# Altium PCB PCB1.PcbDoc
Units mm, origin at the board's own origin, x right, y up, seen from the top; angles counter-clockwise.
Board outline 200 x 200 mm, 2 copper layers (Top Layer, Bottom Layer); 124 components, 110 nets, 534 pads, 0 vias.
Unrouted connection lines stored in the file: 316.
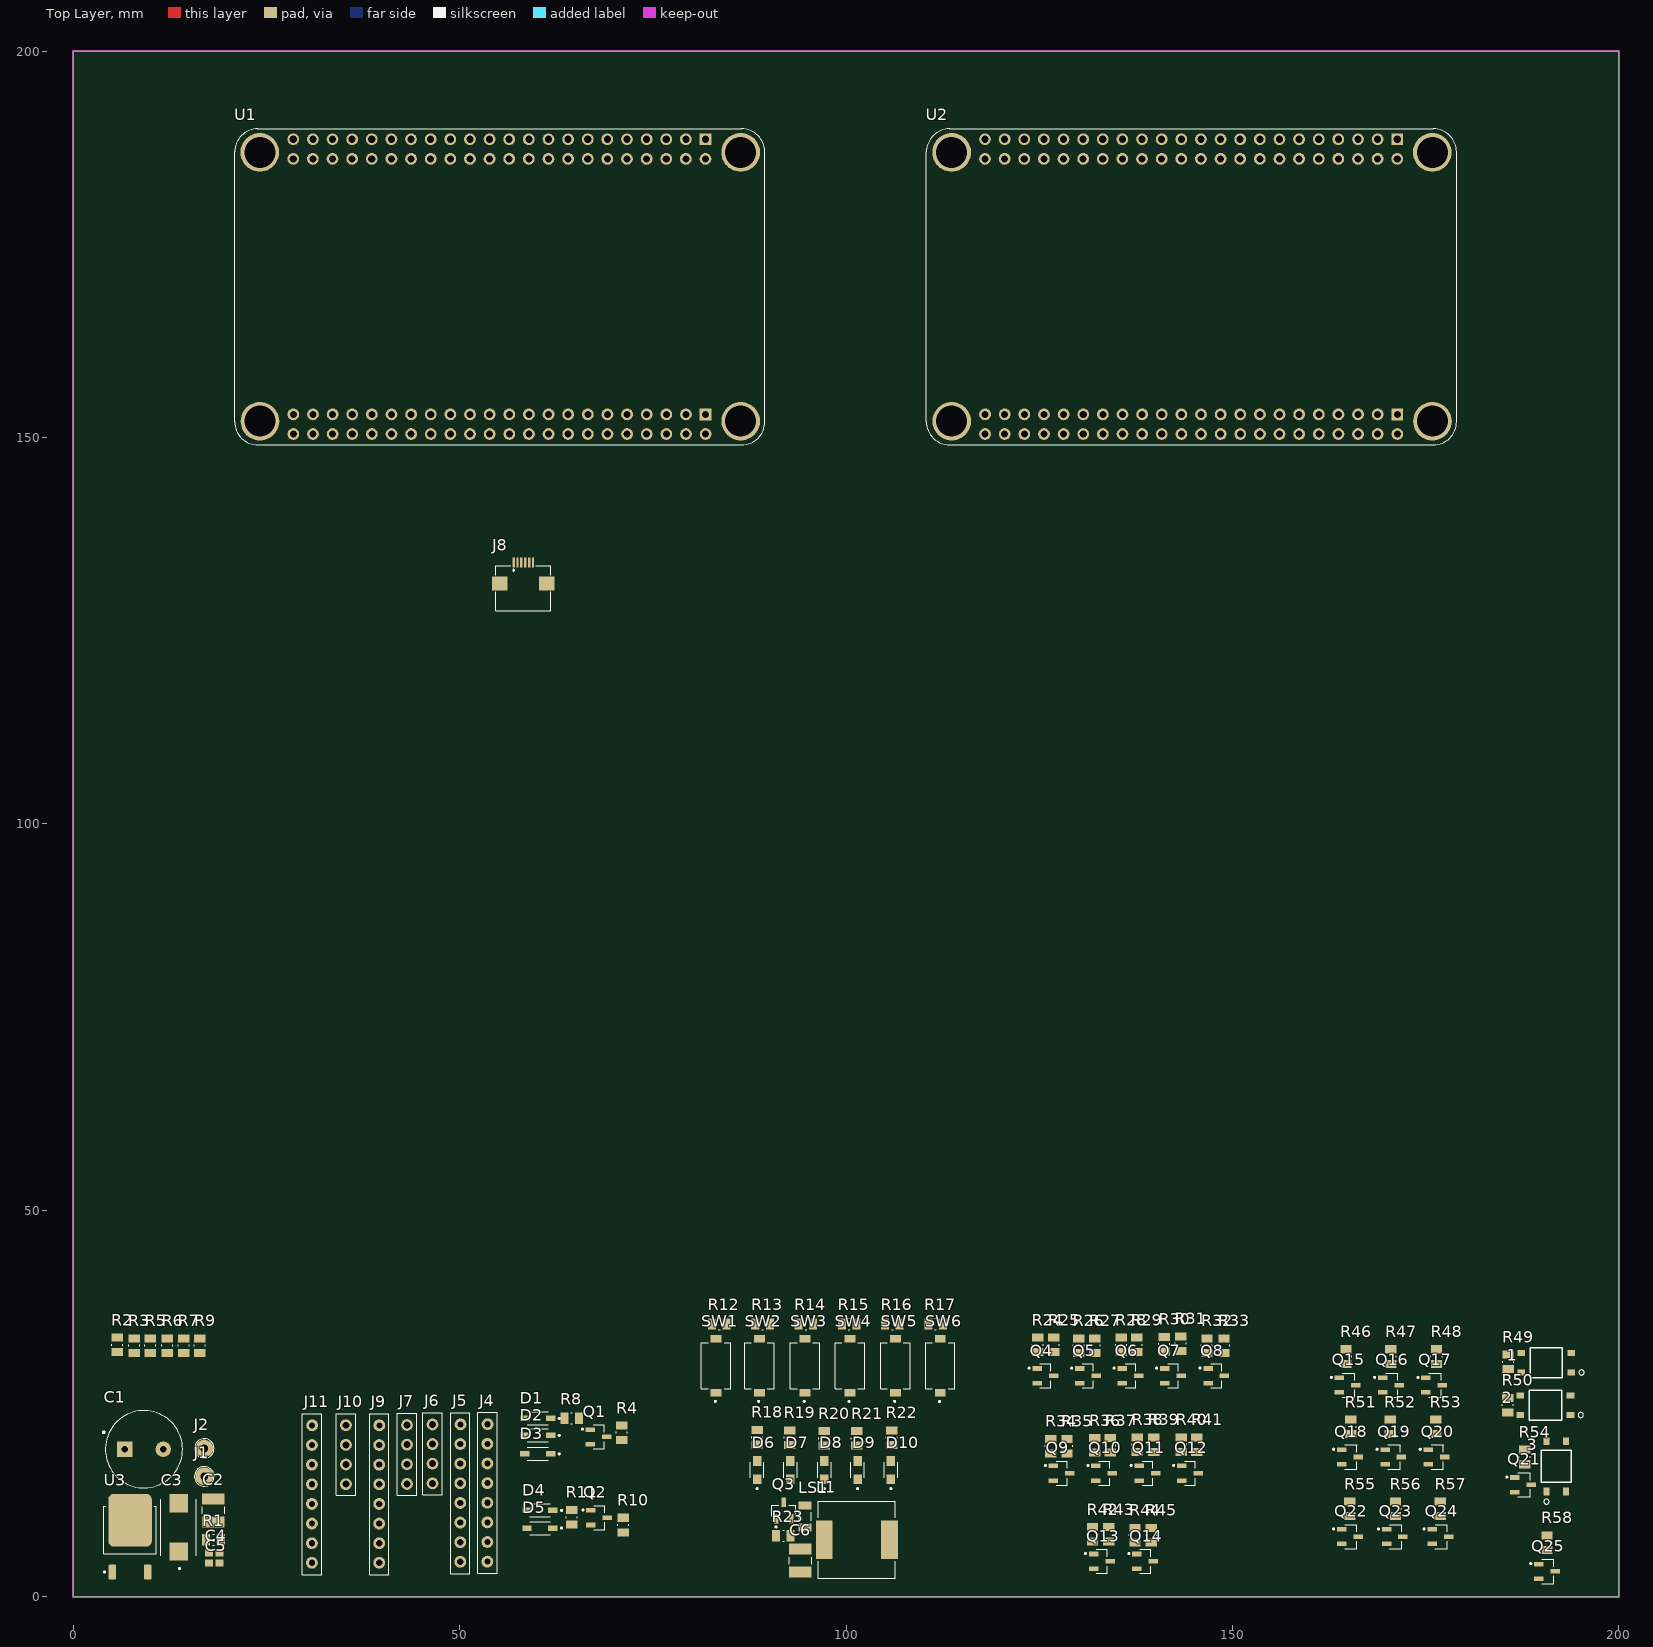
[diagram p0: Top Layer view]
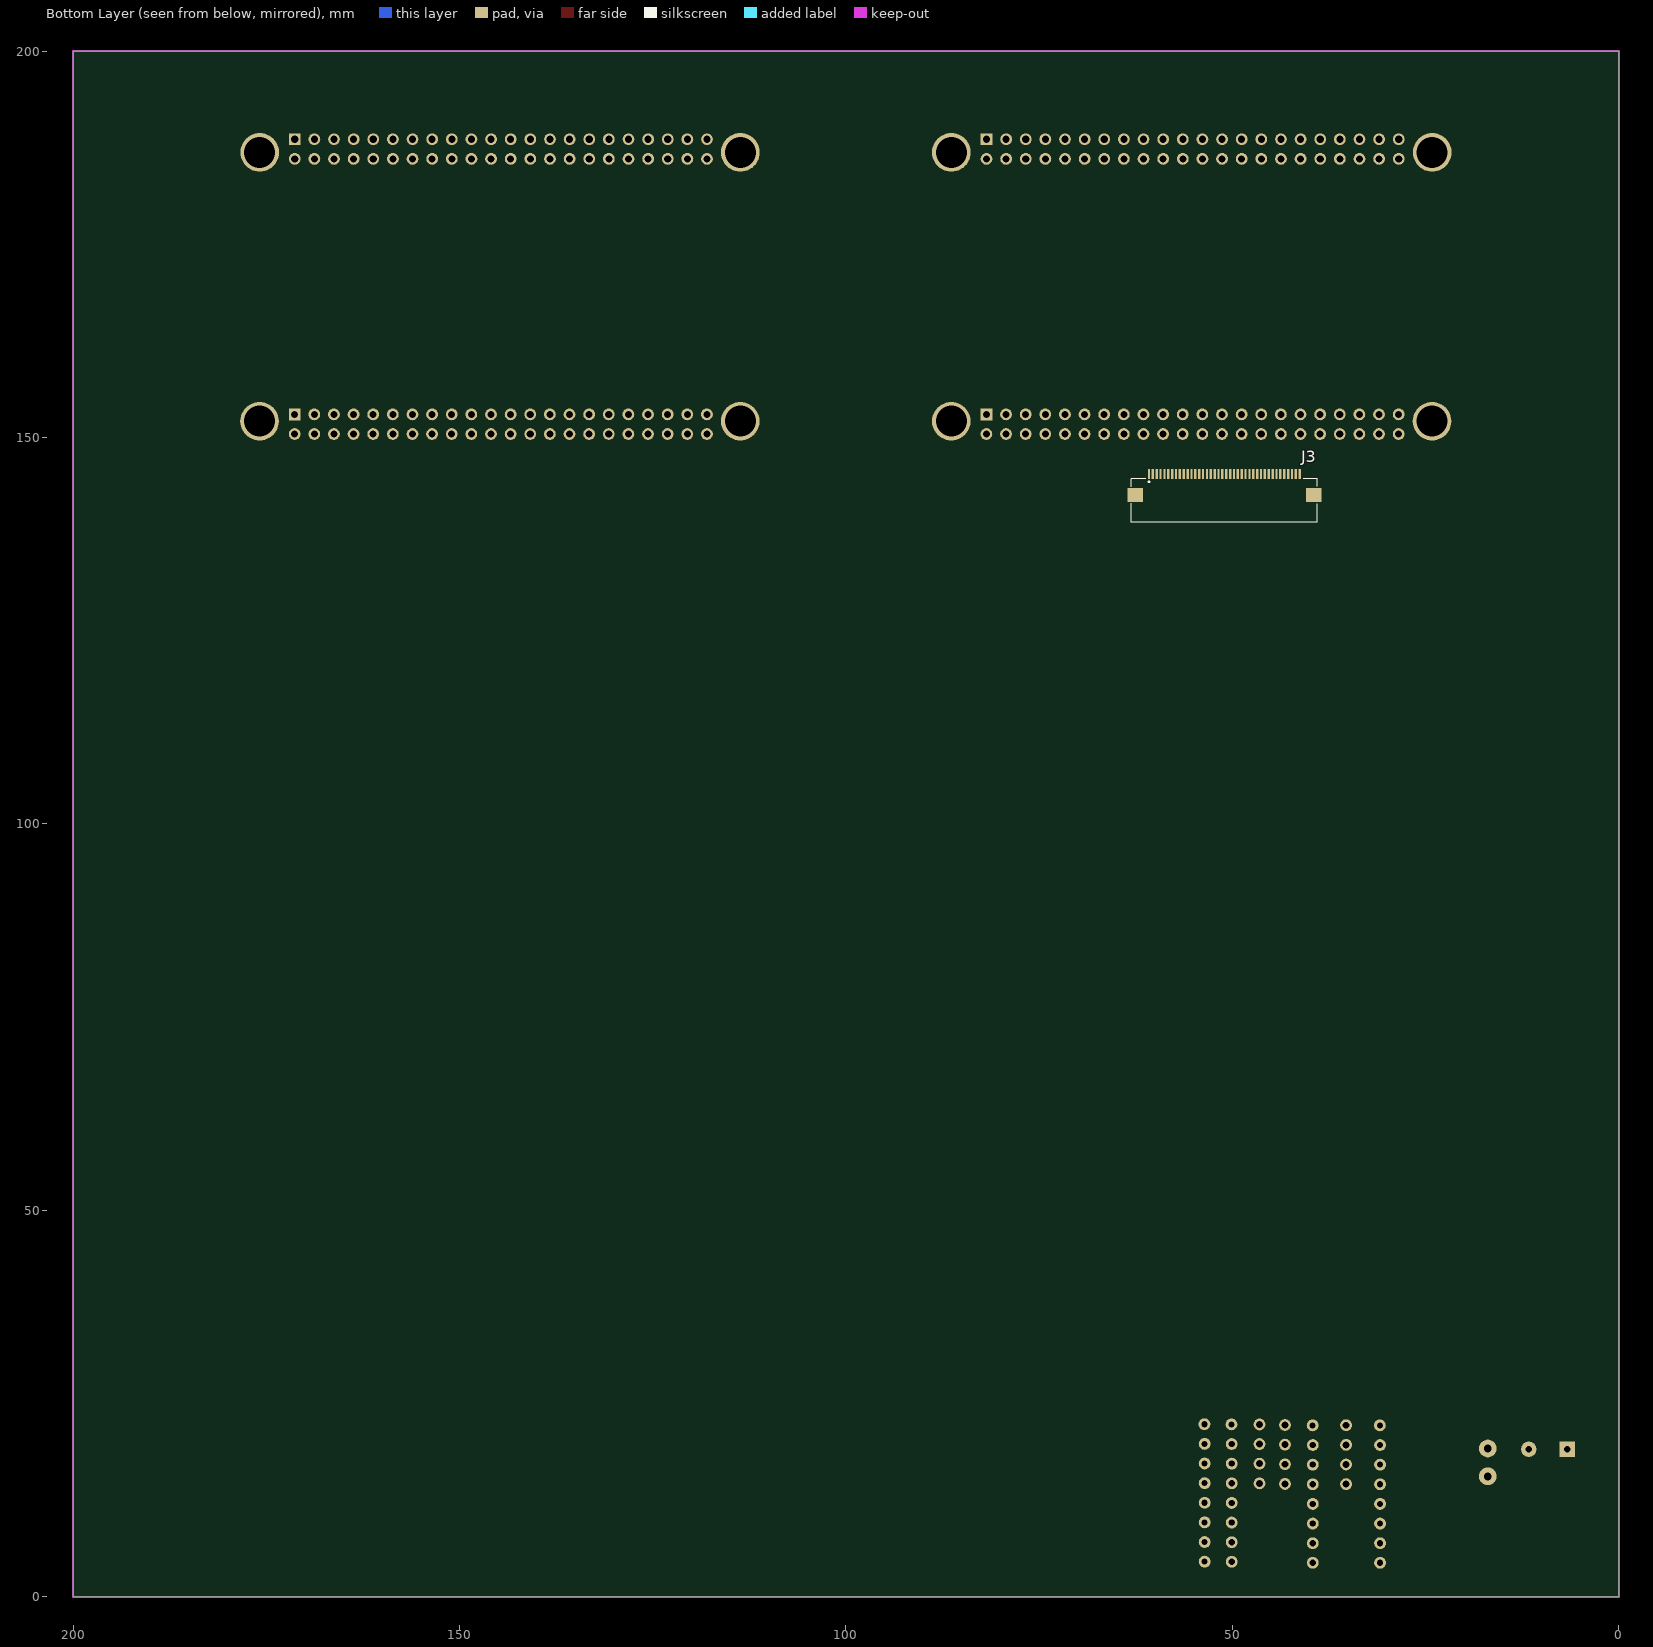
[diagram p1: Bottom Layer view, seen from below]

## Layer stack, top to bottom
Top Solder: solder mask 0.0102, Solder Resist, Dk 3.5
Top Layer: signal copper 0.0356
Dielectric 1: dielectric 0.32, FR-4, Dk 4.8
Bottom Layer: signal copper 0.0356
Bottom Solder: solder mask 0.0102, Solder Resist, Dk 3.5

## Board outline
0,0 200,0 200,200 0,200

## Design rules (kind name [scope] priority, off if disabled: settings)
Clearance [All] p1: gap=0.254 ignorepadtopadclearanceinfootprint=FALSE except(0: Arc-Hole Track-Hole SMDPad-Hole THPad-Hole Via-Hole Fill-Hole Poly-Hole Region-Hole Text-Hole; 0.1: Arc-SMDPad Track-SMDPad SMDPad-SMDPad)
PolygonConnect [All] p1: connectstyle=Relief reliefconductorwidth=0.254 reliefentries=4 polygonreliefangle="90 Angle" airgapwidth=0.254
RoutingVias [All] p1: holewidth=0.711 width=1.27 viastyle="Through Hole" minholewidth=0.711 minwidth=1.27 maxholewidth=0.711 maxwidth=1.27
SolderMaskExpansion [All] p1: expansion=0.102 istentingtop=FALSE
Width [All] p1: maxlimit=0.254 minlimit=0.254 preferedwidth=0.254
30 further rules are at their usual default settings.

## Classes and differential pairs
component class Sheet5: 1 2 3 Q15 Q16 Q17 Q18 Q19 Q20 Q21 Q22 Q23 Q24 Q25 R46 R47 R48 R49 R50 R51 R52 R53 R54 R55 R56 R57 R58
component class Sheet4: Q4 Q5 Q6 Q7 Q8 Q9 Q10 Q11 Q12 Q13 Q14 R24 R25 R26 R27 R28 R29 R30 R31 R32 R33 R34 R35 R36 R37 R38 R39 R40 R41 R42 R43 R44 R45
component class Sheet3: C6 D6 D7 D8 D9 D10 L1 LS1 Q3 R12 R13 R14 R15 R16 R17 R18 R19 R20 R21 R22 R23 SW1 SW2 SW3 SW4 SW5 SW6
component class Sheet2: D1 D2 D3 D4 D5 J5 J10 J11 Q1 Q2 R2 R3 R4 R5 R6 R7 R8 R9 R10 R11
component class Sheet1: C1 C2 C3 C4 C5 J5 J10 R1 U1 U2 U3

## Components (designator, comment, footprint, x,y, rotation, side; value= is the part's Value field where it differs from the comment)
1 "LTV-356T" MINI-FLAT-4 190.6,30.299 r90 top
2 "LTV-356T" MINI-FLAT-4 190.5,24.799 r90 top
3 "LTV-356T" MINI-FLAT-4 191.899,16.9 r0 top
C1 "#NAME?" "CAP 10x16" 9.162,19.1 r0 top value=680μF
C2 "1uF" *CAPC3326X230N 18.162,11.192 r90 top value="10uF 35V"
C3 "#NAME?" "SMD 7343-43" 13.662,9 r90 top value=220uF
C4 "100nF" "SMD 0603" 18.262,5.7 r0 top value="10uF 35V"
C5 "1nF" "SMD 0603" 18.262,4.4 r0 top value="10uF 35V"
C6 "100uF" *CAPC3326X230N 94.1,4.692 r90 top
D1 "1N4148W-7-F" SOD123 60.1,23.1 r180 top
D2 "1N4148W-7-F" SOD123 60.1,20.9 r180 top
D3 "1N4148W-7-F" SOD123 60.1,18.5 r180 top
D4 "1N4148W-7-F" SOD123 60.4,11.2 r180 top
D5 "1N4148W-7-F" SOD123 60.4,8.9 r180 top
D6 "KP-2012" "SMD 0805 LED-Y" 88.499,16.4 r90 top
D7 "KP-2012" "SMD 0805 LED-Y" 92.799,16.4 r90 top
D8 "KP-2012" "SMD 0805 LED-Y" 97.199,16.4 r90 top
D9 "KP-2012" "SMD 0805 LED-Y" 101.499,16.4 r90 top
D10 "KP-2012" "SMD 0805 LED-Y" 105.799,16.4 r90 top
J1 "+12V" Wire 16.962,15.6 r0 top
J2 "GND" Wire 16.962,19.2 r0 top
J3 "FPC-40PinConnector" 687140149022 51.05,145.3 r180 bottom
J4 "PN1X8" PN1X8 53.6,13.45 r90 top
J5 "PN1X8" PN1X8 50.1,13.43 r90 top
J6 "PN1X4" PN1X4 46.499,18.5 r90 top
J7 "PN1X4" PN1X4 43.2,18.43 r90 top
J8 "FPC-6PinConnector" 687106149022 58.25,133.85 r0 top
J9 "PN1X8" PN1X8 39.6,13.3 r90 top
J10 "PN1X4" PN1X4 35.3,18.4 r90 top
J11 "PN1X8" PN1X8 30.9,13.3 r90 top
L1 "DRH104R" DRH104R 101.399,7.4 r0 top
LS1 "Buzzer" "SMD 1206 RES" 94.7,10.4 r90 top
Q1 "SST2222A" SOT-23-3 68,20.7 r0 top
Q2 "SST2222A" SOT-23-3 68.06,10.25 r0 top
Q3 "SST2222A" SOT-23-3 91.95,11.16 r90 top
Q4 "SST2222A" SOT-23-3 125.799,28.6 r0 top
Q5 "SST2222A" SOT-23-3 131.299,28.6 r0 top
Q6 "SST2222A" SOT-23-3 136.799,28.6 r0 top
Q7 "SST2222A" SOT-23-3 142.299,28.6 r0 top
Q8 "SST2222A" SOT-23-3 147.899,28.6 r0 top
Q9 "SST2222A" SOT-23-3 127.899,16 r0 top
Q10 "SST2222A" SOT-23-3 133.399,16 r0 top
Q11 "SST2222A" SOT-23-3 138.999,16 r0 top
Q12 "SST2222A" SOT-23-3 144.499,16 r0 top
Q13 "SST2222A" SOT-23-3 133.1,4.6 r0 top
Q14 "SST2222A" SOT-23-3 138.7,4.6 r0 top
Q15 "DTC114YKA" "SOT-346 (SC59) Black" 164.899,27.4 r0 top
Q16 "DTC114YKA" "SOT-346 (SC59) Black" 170.499,27.4 r0 top
Q17 "DTC114YKA" "SOT-346 (SC59) Black" 176.099,27.4 r0 top
Q18 "DTC114YKA" "SOT-346 (SC59) Black" 165.199,18.1 r0 top
Q19 "DTC114YKA" "SOT-346 (SC59) Black" 170.799,18.1 r0 top
Q20 "DTC114YKA" "SOT-346 (SC59) Black" 176.399,18.1 r0 top
Q21 "DTC114YKA" "SOT-346 (SC59) Black" 187.6,14.5 r0 top
Q22 "DTC114YKA" "SOT-346 (SC59) Black" 165.2,7.8 r0 top
Q23 "DTC114YKA" "SOT-346 (SC59) Black" 171,7.8 r0 top
Q24 "DTC114YKA" "SOT-346 (SC59) Black" 176.899,7.8 r0 top
Q25 "DTC114YKA" "SOT-346 (SC59) Black" 190.7,3.3 r0 top
R1 "47k" "SMD 0805" 18.162,7.4 r0 top
R2 "10k" "SMD 0805" 5.7,32.6 r90 top
R3 "10k" "SMD 0805" 7.9,32.5 r90 top
R4 "10k" "SMD 0805" 71,21.24 r90 top
R5 "10k" "SMD 0805" 10,32.5 r90 top
R6 "10k" "SMD 0805" 12.2,32.5 r90 top
R7 "10k" "SMD 0805" 14.3,32.499 r90 top
R8 "10k" "SMD 0805" 64.5,23.1 r0 top
R9 "10k" "SMD 0805" 16.4,32.5 r90 top
R10 "10k" "SMD 0805" 71.2,9.3 r90 top
R11 "10k" "SMD 0805" 64.5,10.3 r90 top
R12 "10k" "SMD 0805" 83.599,35.3 r0 top
R13 "10k" "SMD 0805" 89.199,35.3 r0 top
R14 "10k" "SMD 0805" 94.799,35.3 r0 top
R15 "10k" "SMD 0805" 100.399,35.3 r0 top
R16 "10k" "SMD 0805" 105.999,35.3 r0 top
R17 "10k" "SMD 0805" 111.599,35.3 r0 top
R18 "220Ohm" "SMD 0805" 88.5,20.64 r90 top
R19 "220Ohm" "SMD 0805" 92.7,20.6 r90 top
R20 "220Ohm" "SMD 0805" 97.2,20.5 r90 top
R21 "220Ohm" "SMD 0805" 101.4,20.5 r90 top
R22 "220Ohm" "SMD 0805" 105.9,20.6 r90 top
R23 "2,7k" "SMD 0805" 91.9,7.9 r180 top
R24 "10k" "SMD 0805" 124.799,32.6 r90 top
R25 "10k" "SMD 0805" 126.9,32.6 r90 top
R26 "10k" "SMD 0805" 130.099,32.5 r90 top
R27 "10k" "SMD 0805" 132.2,32.5 r90 top
R28 "10k" "SMD 0805" 135.599,32.6 r90 top
R29 "10k" "SMD 0805" 137.6,32.6 r90 top
R30 "10k" "SMD 0805" 141.199,32.7 r90 top
R31 "10k" "SMD 0805" 143.3,32.76 r90 top
R32 "10k" "SMD 0805" 146.699,32.5 r90 top
R33 "10k" "SMD 0805" 148.9,32.5 r90 top
R34 "10k" "SMD 0805" 126.499,19.5 r90 top
R35 "10k" "SMD 0805" 128.6,19.5 r90 top
R36 "10k" "SMD 0805" 132.199,19.6 r90 top
R37 "10k" "SMD 0805" 134.2,19.6 r90 top
R38 "10k" "SMD 0805" 137.699,19.7 r90 top
R39 "10k" "SMD 0805" 139.8,19.7 r90 top
R40 "10k" "SMD 0805" 143.399,19.7 r90 top
R41 "10k" "SMD 0805" 145.4,19.7 r90 top
R42 "10k" "SMD 0805" 131.9,8.1 r90 top
R43 "10k" "SMD 0805" 134,8.1 r90 top
R44 "10k" "SMD 0805" 137.399,8 r90 top
R45 "10k" "SMD 0805" 139.5,8 r90 top
R46 "10k" "SMD 0805" 164.699,31.1 r90 top
R47 "10k" "SMD 0805" 170.499,31.1 r90 top
R48 "10k" "SMD 0805" 176.399,31.1 r90 top
R49 "10k" "SMD 0805" 185.7,30.4 r270 top
R50 "10k" "SMD 0805" 185.6,24.8 r270 top
R51 "10k" "SMD 0805" 165.3,22 r90 top
R52 "10k" "SMD 0805" 170.399,22 r90 top
R53 "10k" "SMD 0805" 176.299,22 r90 top
R54 "10k" "SMD 0805" 187.8,18.1 r90 top
R55 "10k" "SMD 0805" 165.199,11.4 r90 top
R56 "10k" "SMD 0805" 171.099,11.4 r90 top
R57 "10k" "SMD 0805" 176.899,11.4 r90 top
R58 "10k" "SMD 0805" 190.7,7 r90 top
SW1 "but" SW_KSR221GLFS 83.199,29.9 r90 top
SW2 "but" SW_KSR221GLFS 88.799,29.9 r90 top
SW3 "but" SW_KSR221GLFS 94.699,29.9 r90 top
SW4 "but" SW_KSR221GLFS 100.499,29.9 r90 top
SW5 "but" SW_KSR221GLFS 106.399,29.9 r90 top
SW6 "but" SW_KSR221GLFS 112.199,29.9 r90 top
U1 "STM32H750VBT6 WeActStudio" "WeActStudio STM32H750VBT6" 55.2,169.5 r270 top
U2 "STM32F407VGT6 DevEBox" "DevEBox V3.0 STM32F407VGT6" 144.7,169.5 r270 top
U3 "BA05CC0WFP-E2" DPAK228P968X238-4N 7.362,7.8 r0 top

## Footprints (in the part's own frame and the unit in brackets; to place one, negate y for a bottom-side part, rotate by r counter-clockwise, add the part's x,y. Pads: shape width x height; smd on the part's side, far side on the other; paste and mask are expansions set on the pad)
687106149022 [mm]
  rect 0.3x1.3 smd: 1(-1.25,0) 2(-0.75,0) 3(-0.25,0) 4(0.25,0) 5(0.75,0) 6(1.25,0)
  rect 2x1.8 smd: Z1(-3.05,-2.75) Z2(3.05,-2.75)
  silkscreen extent -3.55,-6.25 3.55,-0.45, body extent -3.55,-6.33 3.55,0.17, height 2.3
687140149022 [mm]
  rect 0.3x1.3 smd: 1(-9.75,0) 2(-9.25,0) 3(-8.75,0) 4(-8.25,0) 5(-7.75,0) 6(-7.25,0) 7(-6.75,0) 8(-6.25,0) 9(-5.75,0) 10(-5.25,0) 11(-4.75,0) 12(-4.25,0) 13(-3.75,0) 14(-3.25,0) 15(-2.75,0) 16(-2.25,0) 17(-1.75,0) 18(-1.25,0) 19(-0.75,0) 20(-0.25,0) 21(0.25,0) 22(0.75,0) 23(1.25,0) 24(1.75,0) 25(2.25,0) 26(2.75,0) 27(3.25,0) 28(3.75,0) 29(4.25,0) 30(4.75,0) 31(5.25,0) 32(5.75,0) 33(6.25,0) 34(6.75,0) 35(7.25,0) 36(7.75,0) 37(8.25,0) 38(8.75,0) 39(9.25,0) 40(9.75,0)
  rect 2x1.8 smd: Z1(-11.55,-2.75) Z2(11.55,-2.75)
  silkscreen extent -12.05,-6.27 12.05,-0.65, body extent -12.05,-6.8 12.05,-0.3, height 2.3
*CAPC3326X230N [mm]
  rect 1.42x2.91 smd: 1(-1.492,0) 2(1.492,0)
  silkscreen extent -0.46,-1.45 0.46,1.45, body extent -1.65,-1.3 1.65,1.3, height 2.4
"CAP 10x16" [mm]
  rect 2x2 hole 0.82: 1(-2.5,0)
  round 2 hole 0.82: 2(2.5,0)
  silkscreen extent -5.3,-5 5,5, body extent -5.03,-5.03 5.03,5.03, height 16.63
"DevEBox V3.0 STM32F407VGT6" [mil] "Development board with a STM32F407VGT6 MCU"
  rect 60x60 hole 36: 1(-751.81,1048.15) 45(649.8,1048.62)
  round 60 hole 36: 2(-651.81,1048.15) 3(-751.81,948.15) 4(-651.81,948.15) 5(-751.81,848.15) 6(-651.81,848.15) 7(-751.81,748.15) 8(-651.81,748.15) 9(-751.81,648.15) 10(-651.81,648.15) 11(-751.81,548.15) 12(-651.81,548.15) 13(-751.81,448.15) 14(-651.81,448.15) 15(-751.81,348.15) 16(-651.81,348.15) 17(-751.81,248.15) 18(-651.81,248.15) 19(-751.81,148.15) 20(-651.81,148.15) 21(-751.81,48.15) 22(-651.81,48.15) 23(-751.81,-51.85) 24(-651.81,-51.85) 25(-751.81,-151.85) 26(-651.81,-151.85) 27(-751.81,-251.85) 28(-651.81,-251.85) 29(-751.81,-351.85) 30(-651.81,-351.85) 31(-751.81,-451.85) 32(-651.81,-451.85) 33(-751.81,-551.85) 34(-651.81,-551.85) 35(-751.81,-651.85) 36(-651.81,-651.85) 37(-751.81,-751.85) 38(-651.81,-751.85) 39(-751.81,-851.85) 40(-651.81,-851.85) 41(-751.81,-951.85) 42(-651.81,-951.85) 43(-751.81,-1051.85) 44(-651.81,-1051.85) 46(749.8,1048.62) 47(649.8,948.62) 48(749.8,948.62) 49(649.8,848.62) 50(749.8,848.62) 51(649.8,748.62) 52(749.8,748.62) 53(649.8,648.62) 54(749.8,648.62) 55(649.8,548.62) 56(749.8,548.62) 57(649.8,448.62) 58(749.8,448.62) 59(649.8,348.62) 60(749.8,348.62) 61(649.8,248.62) 62(749.8,248.62) 63(649.8,148.62) 64(749.8,148.62) 65(649.8,48.62) 66(749.8,48.62) 67(649.8,-51.38) 68(749.8,-51.38) 69(649.8,-151.38) 70(749.8,-151.38) 71(649.8,-251.38) 72(749.8,-251.38) 73(649.8,-351.38) 74(749.8,-351.38) 75(649.8,-451.38) 76(749.8,-451.38) 77(649.8,-551.38) 78(749.8,-551.38) 79(649.8,-651.38) 80(749.8,-651.38) 81(649.8,-751.38) 82(749.8,-751.38) 83(649.8,-851.38) 84(749.8,-851.38) 85(649.8,-951.38) 86(749.8,-951.38) 87(649.8,-1051.38) 88(749.8,-1051.38)
  round 196.85 hole 157.48 unplated: 6(-684.88,1226.89) 6(-684.88,-1221.93) 6(684.06,1227.36) 6(684.06,-1221.46)
  silkscreen extent -805,-1350 805,1350
DPAK228P968X238-4N [mm]
  rrect24% 0.96x1.9 smd: 1(-2.28,-4.59) 3(2.28,-4.59)
  rrect24% 5.63x6.84 smd paste-4: 2(0,2.12)
  silkscreen extent -3.4,-4.7 3.37,3.9, body extent -3.25,-4.75 3.25,4.75, height 2.5
DRH104R [mm]
  rect 2.15x5 smd: 1(-4.225,0) 2(4.225,0)
  silkscreen extent -5,-5 5,5, body extent -5,-5 5,5, height 5
MINI-FLAT-4 [mm]
  rect 0.8x1 smd: 1(-1.27,-3.25) 2(1.27,-3.25) 3(1.27,3.25) 4(-1.27,3.25)
  silkscreen extent -1.92,-4.91 1.92,2.08, body extent -1.92,-3.5 1.93,3.5, height 2.2
PN1X4 [mm]
  round 1.53 hole 0.9: 1(-3.81,0) 2(-1.27,0) 3(1.27,0) 4(3.81,0)
  silkscreen extent -5.28,-1.25 5.33,1.25, body extent -4.37,-0.97 4.22,1.02, height 5.75
PN1X8 [mm]
  round 1.53 hole 0.8: 1(-8.89,0) 2(-6.35,0) 3(-3.81,0) 4(-1.27,0) 5(1.27,0) 6(3.81,0) 7(6.35,0) 8(8.89,-0.025)
  silkscreen extent -10.41,-1.25 10.41,1.25, body extent -10.39,-1.22 7.89,1.28, height 8.75
"SMD 0603" [mm]
  rect 1.07x0.93 smd: 1(-0.68,0) 2(0.68,0)
  body extent -0.8,-0.4 0.8,0.4, height 0.6
"SMD 0805" [mm]
  rect 1.04x1.47 smd: 1(-0.94,0) 2(0.94,0)
  silkscreen extent -0.1,-0.72 0.1,0.72, body extent -1,-0.62 1,0.63, height 0.6
"SMD 0805 LED-Y" [mm]
  rect 1.25x1.1 smd: A(1.175,0) C(-1.175,0)
  silkscreen extent -2.5,-0.86 1,0.86, body extent -1,-0.62 1,0.63, height 1.1
"SMD 1206 RES" [mm]
  rect 1.07x1.68 smd: 1(-1.43,0) 2(1.43,0)
  silkscreen extent -0.57,-0.83 0.57,0.83, body extent -1.55,-0.77 1.55,0.78, height 0.75
"SMD 7343-43" [mm]
  rect 2.37x2.43 smd: 1(-3.12,0) 2(3.12,0)
  silkscreen extent -5.41,-2.3 3.65,2.3, body extent -3.7,-2.22 3.7,2.23, height 4.3
SOD123 [mm]
  rect 1.21x0.73 smd: A(1.68,0) C(-1.68,0)
  silkscreen extent -2.9,-0.85 1.35,0.85, body extent -1.82,-0.77 1.83,0.78, height 1.6
SOT-23-3 [mm]
  rect 1.23x0.59 smd: 1(-1.06,0.95) 2(-1.06,-0.95) 3(1.06,0)
  silkscreen extent -2.2,-1.56 0.7,1.56, body extent -1.4,-1.45 1.4,1.45, height 1.4
"SOT-346 (SC59) Black" [mm]
  rect 1.23x0.59 smd: 1(-1.06,0.95) 2(-1.06,-0.95) 3(1.06,0)
  silkscreen extent -2.2,-1.58 0.9,1.56, body extent -1.4,-1.45 1.4,1.45, height 1.3
SW_KSR221GLFS [mm]
  rect 1x1.4 smd: 1(-3.5,0) 2(3.5,0)
  silkscreen extent -4.7,-1.9 3,1.9, body extent -4,-1.75 4,1.75, height 4.3
"WeActStudio STM32H750VBT6" [mil] "Development board with a STM32H750VBT6 MCU"
  rect 60x60 hole 36: 1(-751.81,1048.15) 45(649.8,1048.62)
  round 60 hole 36: 2(-651.81,1048.15) 3(-751.81,948.15) 4(-651.81,948.15) 5(-751.81,848.15) 6(-651.81,848.15) 7(-751.81,748.15) 8(-651.81,748.15) 9(-751.81,648.15) 10(-651.81,648.15) 11(-751.81,548.15) 12(-651.81,548.15) 13(-751.81,448.15) 14(-651.81,448.15) 15(-751.81,348.15) 16(-651.81,348.15) 17(-751.81,248.15) 18(-651.81,248.15) 19(-751.81,148.15) 20(-651.81,148.15) 21(-751.81,48.15) 22(-651.81,48.15) 23(-751.81,-51.85) 24(-651.81,-51.85) 25(-751.81,-151.85) 26(-651.81,-151.85) 27(-751.81,-251.85) 28(-651.81,-251.85) 29(-751.81,-351.85) 30(-651.81,-351.85) 31(-751.81,-451.85) 32(-651.81,-451.85) 33(-751.81,-551.85) 34(-651.81,-551.85) 35(-751.81,-651.85) 36(-651.81,-651.85) 37(-751.81,-751.85) 38(-651.81,-751.85) 39(-751.81,-851.85) 40(-651.81,-851.85) 41(-751.81,-951.85) 42(-651.81,-951.85) 43(-751.81,-1051.85) 44(-651.81,-1051.85) 46(749.8,1048.62) 47(649.8,948.62) 48(749.8,948.62) 49(649.8,848.62) 50(749.8,848.62) 51(649.8,748.62) 52(749.8,748.62) 53(649.8,648.62) 54(749.8,648.62) 55(649.8,548.62) 56(749.8,548.62) 57(649.8,448.62) 58(749.8,448.62) 59(649.8,348.62) 60(749.8,348.62) 61(649.8,248.62) 62(749.8,248.62) 63(649.8,148.62) 64(749.8,148.62) 65(649.8,48.62) 66(749.8,48.62) 67(649.8,-51.38) 68(749.8,-51.38) 69(649.8,-151.38) 70(749.8,-151.38) 71(649.8,-251.38) 72(749.8,-251.38) 73(649.8,-351.38) 74(749.8,-351.38) 75(649.8,-451.38) 76(749.8,-451.38) 77(649.8,-551.38) 78(749.8,-551.38) 79(649.8,-651.38) 80(749.8,-651.38) 81(649.8,-751.38) 82(749.8,-751.38) 83(649.8,-851.38) 84(749.8,-851.38) 85(649.8,-951.38) 86(749.8,-951.38) 87(649.8,-1051.38) 88(749.8,-1051.38)
  round 196.85 hole 157.48 unplated: 6(-684.88,1226.89) 6(-684.88,-1221.93) 6(684.06,1227.36) 6(684.06,-1221.46)
  silkscreen extent -805,-1350 805,1350
Wire [mm]
  round 2.3 hole 1.02: 1(0,0)
  silkscreen extent -1.27,-1.27 1.27,1.27, body extent -1.59,-1.59 1.59,1.59, height 5.69

## Part data
1 2 3: "Optoisolator Transistor Output 3750Vrms 1 Channel 4-SOP", Package="SOP-4 Lite-On Inc.", Availability=Unavailable, MF="Lite-On Inc.", MP=LTV-356T, Price=None, SnapEDA_Link=https://www.snapeda.com/parts/LTV-356T/Lite-On%20Inc./view-part/448527/?ref=snap
C1: library part "CAP Aluminium", Case=ТМ1V221M-RBF16, Manufacturer=FUJICON, Package=8x16x3.5, Temperature=-55...+105°C, Voltage=25V, HelpURL=https://store.comet.bg/Catalogue/Product/6157/, Tipe="Low ESR"
C2 C4 C5 C6: library part CL32B106KLJNNNE, "C1210 10uF 35V X7R", Case="SMD 1210", Manufacturer="SAMSUNG ELECTRO-MECHANICS", HelpURL=https://store.comet.bg/Catalogue/Product/36844/, Model=CL32B106KLJNNNE
C3: library part "Cap Tant 220uF 10V Case E", "Cap Tant Solid 220uF 10V E CASE 10% _7.3 X 4.3 X 4mm_ SMD 7343-43 0.1 Ohm 125В°C T/R", Manufacturer=VISHAY, Package="SMD 7343-43   7.3 x 4.3 x 4", Voltage=10V, HalpURL=https://store.comet.bg/Catalogue/Product/15617/, Model=593D227X9010E2TE3
D1 D2 D3 D4 D5: "Diode Standard 100V 300mA _DC_ Surface Mount SOD-123", Case="SOD-123 Diodes Inc.", HelpURL=https://store.comet.bg/Catalogue/Product/9613/, MF="DIODES / ZETEX", Model=1N4148W-7-F
D6 D7 D8 D9 D10: "LED 2.0x1.25mm, 50-160 mcd@20mA, W.Clear, 120°", Package="0805 Rohm Semiconductor", Availability=Unavailable, MF="Rohm Semiconductor", MP=SMLMN2WB1CW1C, Price=None, SnapEDA_Link=https://www.snapeda.com/parts/SMLMN2WB1CW1C/Rohm/view-part/3217279/?ref=snap
J1 J2: library part Wire, "Wire"
J3: "40 Position FFC, FPC Connector Contacts, Bottom 0.020 (0.50mm) Surface Mount, Right Angle", Package=None, Availability="In Stock", Check_prices=https://www.snapeda.com/parts/687140149022/Wurth+Electronics+Inc./view-part/?ref=eda, MF="Wurth Electronics", MP=687140149022, Price=None, Purchase-URL=https://pricing.snapeda.com/search/part/687140149022/?ref=eda, SnapEDA_Link=https://www.snapeda.com/parts/687140149022/Wurth+Electronics+Inc./view-part/?ref=snap
J4 J5 J9 J11: "Single Row / Straight / Without Shroud Female header Female 8", Package=None, Availability=Unavailable, MF="WÃ¼rth Elektronik", MP=61300711821, Price=None, SnapEDA_Link=https://www.snapeda.com/parts/61300711821/W%C3%BCrth%20Elektronik/view-part/2704590/?ref=snap
J6 J7 J10: "Single Row / Straight / Without Shroud Female header Female 4 @ Pin header, socket _Si...", Package=None, Availability=Unavailable, MF="WÃ¼rth Elektronik", MP=61300711821, Price=None, SnapEDA_Link=https://www.snapeda.com/parts/61300711821/W%C3%BCrth%20Elektronik/view-part/2704590/?ref=snap
J8: "6 Position FFC, FPC Connector Contacts, Bottom 0.020 (0.50mm) Surface Mount, Right Angle", Package=None, Availability="In Stock", Check_prices=https://www.snapeda.com/parts/687106149022/Wurth+Elektronik/view-part/?ref=eda, MF="WÃ¼rth Elektronik", MP=687106149022, Price=None, Purchase-URL=https://pricing.snapeda.com/search/part/687106149022/?ref=eda, SnapEDA_Link=https://www.snapeda.com/parts/687106149022/Wurth+Elektronik/view-part/?ref=snap
L1: "Inductor with Inductance: 1.5uH Tol. +/-30%, Package: 3939 (100100)", Package=NONSTANDARD, Availability=Warning, Check_prices=https://www.snapeda.com/parts/1274AS-H-1R5N=P3/Murata/view-part/4549270/?ref=eda, MF=Murata, MP=1274AS-H-1R5N=P3, Price=None, Purchase-URL=https://pricing.snapeda.com/search/part/1274AS-H-1R5N=P3/?ref=eda, SnapEDA_Link=https://www.snapeda.com/parts/1274AS-H-1R5N=P3/Murata/view-part/4549270/?ref=snap
LS1: Package=None, Availability=Unavailable, MP=KPEG242-5V, Price=None
Q1 Q2 Q3 Q4 Q5 Q6 Q7 Q8 Q9 Q10 Q11 Q12 Q13 Q14: "Transistor NPN 40V 600mA 300MHz 350mW", Case="SOT-23-3 SST3", Manufacturer="ROHM Semiconductor", HelpURL=https://store.comet.bg/Catalogue/Product/23715/, Model=SST2222A
Q15 Q16 Q17 Q18 Q19 Q20 Q21 Q22 Q23 Q24 Q25: "NPN Digital 50V 100mA 200mW  R1=10kOm R2=47kOm", Case="SOT-346 (SC59)", Manufacturer="ROHM Semiconductor", HalpURL=https://store.comet.bg/Catalogue/Product/23715/, Model=DTC114YKA
R1 R2 R3 R4 R5 R6 R7 R8 R9 R10 R11 R12 R13 R14 R15 R16 R17 R18 R19 R20 R21 R22 R23 R24 R25 R26 R27 R28 R29 R30 R31 R32 R33 R34 R35 R36 R37 R38 R39 R40 R41 R42 R43 R44 R45 R46 R47 R48 R49 R50 R51 R52 R53 R54 R55 R56 R57 R58: library part Resistor_1, "RES", HelpURL=https://store.comet.bg/Catalogue/RES/Resistors/#eyJpcHAiOiIxMDAiLCJtIjoiIn0%3D
SW1 SW2 SW3 SW4 SW5 SW6: library part KSR221GLFS, "Tactile Switch 2p SPST-NO 50mA/32V 6x3.8x2.5mm", Package=6x3.8x2.5mm, MF=C&K, MP=KSR221GLFS, URL=https://store.comet.bg/Catalogue/Product/17512/
U3: library part BA05CC0FP-E2, "LDO Regulator", Case=TO252-5-11, Manufacturer="ROHM Semiconductor", HelpURL=https://store.comet.bg/Catalogue/Product/4871/, Model=BA05CC0WFP-E2

## Nets (pads, with @x,y where several pads share a name; then routed paths per layer and width w, separated by ;. In a path a pad name is that pad's centre, name@x,y a point inside that pad or via, vN(x,y) a via of type N, cw(c..) or ccw(c..) an arc to the next point about the centre after c; other vN are vias at no path point)
GND: 1.2 1.3 2.2 2.3 3.3 C1.2 C2.1 C3.2 C4.1 C5.1 C6.1 D6.C D7.C D8.C D9.C D10.C J2.1 J3.2 J3.4 J3.5 J3.6 J3.7 J5.8 J6.4 J7.4 J8.6 J9.4 J9.5 J9.6 J9.7 J9.8 J10.3 J11.5 J11.6 J11.7 J11.8 Q1.1 Q2.1 Q3.1 Q4.1 Q5.1 Q6.1 Q7.1 Q8.1 Q9.1 Q10.1 Q11.1 Q12.1 Q13.1 Q14.1 Q15.2 Q16.2 Q17.2 Q18.2 Q19.2 Q20.2 Q21.2 Q22.2 Q23.2 Q24.2 Q25.2 R8.2 R9.2 R11.2 SW1.2 SW2.2 SW3.2 SW4.2 SW5.2 SW6.2 U1.1 U1.45 U1.59 U1.87 U1.88 U2.3 U2.4 U2.5 U2.6 U2.49 U2.50
Net1_1: 1.1 R49.2
Net1_4: 1.4 J7.2
Net2_1: 2.1 R50.2
Net2_4: 2.4 J7.1
Net3_1: 3.1 R54.2
Net3_2: 3.2 Q21.3
Net3_4: 3.4 J7.3
NetC1_1: C1.1 C2.2 J1.1 R1.1 U3.1
NetC3_1: C3.1 C4.2 L1.1 R46.1 R47.1 R48.1 R51.1 R52.1 R53.1 R54.1 R55.1 R56.1 R57.1 R58.1 U1.2 U1.86 U2.45 U2.46 U3.3
NetC5_2: C5.2 R1.2 U3.2
NetC6_2: C6.2 L1.2 LS1.2
NetD1_A: D1.A Q12.3 R41.2
NetD1_C: D1.C D2.C D3.C Q1.2 R8.1
NetD2_A: D2.A Q13.3 R43.2
NetD3_A: D3.A Q14.3 R45.2
NetD4_A: D4.A Q8.3 R33.2
NetD4_C: D4.C D5.C Q2.2 R11.1
NetD5_A: D5.A Q1.3 Q21.1 R4.2
NetD6_A: D6.A R18.2
NetD7_A: D7.A R19.2
NetD8_A: D8.A R20.2
NetD9_A: D9.A R21.2
NetD10_A: D10.A R22.2
NetJ3_1: J3.1 J3.3 J3.34 J3.35 J8.1 J10.4 J11.1 J11.2 J11.3 J11.4 R2.1 R3.2 R4.1 R5.2 R6.1 R7.1 R10.1 R12.1 R13.1 R14.1 R15.1 R16.1 R17.1 R24.1 R25.1 R26.1 R27.1 R28.1 R29.1 R30.1 R31.1 R32.1 R33.1 R34.1 R35.1 R36.1 R37.1 R38.1 R39.1 R40.1 R41.1 R42.1 R43.1 R44.1 R45.1 U1.46 U1.85
NetJ3_8: J3.8 R9.1 U1.83
NetJ3_9: J3.9 U1.38
NetJ3_10: J3.10 U1.39
NetJ3_11: J3.11 U1.40
NetJ3_12: J3.12 U1.82
NetJ3_13: J3.13 U1.81
NetJ3_14: J3.14 U1.80
NetJ3_15: J3.15 U1.79
NetJ3_16: J3.16 U1.78
NetJ3_17: J3.17 U1.77
NetJ3_18: J3.18 U1.76
NetJ3_19: J3.19 U1.75
NetJ3_20: J3.20 U1.74
NetJ3_21: J3.21 U1.18
NetJ3_22: J3.22 U1.19
NetJ3_23: J3.23 U1.33
NetJ3_24: J3.24 U1.34
NetJ3_26: J3.26 R6.2 U1.43
NetJ3_29: J3.29 U1.15
NetJ3_30: J3.30 U1.14
NetJ3_31: J3.31 U1.37
NetJ3_32: J3.32 R7.2 U1.13
NetJ4_1: J4.1 Q4.2 R24.2
NetJ4_2: J4.2 Q5.2 R26.2
NetJ4_3: J4.3 Q6.2 R28.2
NetJ4_4: J4.4 Q7.2 R30.2
NetJ4_5: J4.5 Q8.2 R32.2
NetJ4_6: J4.6 Q9.2 R34.2
NetJ4_7: J4.7 Q10.2 R36.2
NetJ4_8: J4.8 Q11.2 R38.2
NetJ5_1: J5.1 Q18.3 R51.2
NetJ5_2: J5.2 Q22.3 R55.2
NetJ5_3: J5.3 Q19.3 R52.2
NetJ5_4: J5.4 Q23.3 R56.2
NetJ5_5: J5.5 Q20.3 R53.2
NetJ5_6: J5.6 Q24.3 R57.2
NetJ5_7: J5.7 Q25.3 R58.2
NetJ6_1: J6.1 Q15.3 R46.2
NetJ6_2: J6.2 Q16.3 R47.2
NetJ6_3: J6.3 Q17.3 R48.2
NetJ8_2: J8.2 R5.1 U1.68
NetJ8_3: J8.3 U1.67
NetJ8_4: J8.4 R3.1 U1.29
NetJ8_5: J8.5 R2.2 U1.28
NetJ9_1: J9.1 Q12.2 R40.2
NetJ9_2: J9.2 Q13.2 R42.2
NetJ9_3: J9.3 Q14.2 R44.2
NetJ10_1: J10.1 U1.32
NetJ10_2: J10.2 U1.31
NetLS1_1: LS1.1 Q3.3
NetQ2_3: Q2.3 R10.2 U2.82
NetQ3_2: Q3.2 R23.2
NetQ4_3: Q4.3 R25.2 U2.12
NetQ5_3: Q5.3 R27.2 U2.9
NetQ6_3: Q6.3 R29.2 U2.10
NetQ7_3: Q7.3 R31.2 U2.28
NetQ9_3: Q9.3 R35.2 U2.83
NetQ10_3: Q10.3 R37.2 U2.84
NetQ11_3: Q11.3 R39.2 U2.85
NetQ15_1: Q15.1 U2.24
NetQ16_1: Q16.1 U2.23
NetQ17_1: Q17.1 U2.64
NetQ18_1: Q18.1 U2.33
NetQ19_1: Q19.1 U2.34
NetQ20_1: Q20.1 U2.31
NetQ22_1: Q22.1 U2.29
NetQ23_1: Q23.1 U2.30
NetQ24_1: Q24.1 U2.27
NetQ25_1: Q25.1 U2.69
NetR12_2: R12.2 SW1.1 U1.3
NetR13_2: R13.2 SW2.1 U1.4
NetR14_2: R14.2 SW3.1 U1.5
NetR15_2: R15.2 SW4.1 U1.6
NetR16_2: R16.2 SW5.1 U1.7
NetR17_2: R17.2 SW6.1 U1.8
NetR18_1: R18.1 U1.48
NetR19_1: R19.1 U1.49
NetR20_1: R20.1 U1.50
NetR21_1: R21.1 U1.51
NetR22_1: R22.1 U1.53
NetR23_1: R23.1 U1.25
NetR49_1: R49.1 U2.81
NetR50_1: R50.1 U2.80
NetU1_63: U1.63 U2.53
NetU1_64: U1.64 U2.52
pads on no net: J3.25 J3.27 J3.28 J3.33 J3.36 J3.37 J3.38 J3.39 J3.40 J3.Z1 J3.Z2 J8.Z1 J8.Z2 U1.9 U1.10 U1.11 U1.12 U1.16 U1.17 U1.20 U1.21 U1.22 U1.23 U1.24 U1.26 U1.27 U1.30 U1.35 U1.36 U1.41 U1.42 U1.44 U1.47 U1.52 U1.54 U1.55 U1.56 U1.57 U1.58 U1.60 U1.61 U1.62 U1.65 U1.66 U1.69 U1.70 U1.71 U1.72 U1.73 U1.84 U2.1 U2.2 U2.7 U2.8 U2.11 U2.13 U2.14 U2.15 U2.16 U2.17 U2.18 U2.19 U2.20 U2.21 U2.22 U2.25 U2.26 U2.32 U2.35 U2.36 U2.37 U2.38 U2.39 U2.40 U2.41 U2.42 U2.43 U2.44 U2.47 U2.48 U2.51 U2.54 U2.55 U2.56 U2.57 U2.58 U2.59 U2.60 U2.61 U2.62 U2.63 U2.65 U2.66 U2.67 U2.68 U2.70 U2.71 U2.72 U2.73 U2.74 U2.75 U2.76 U2.77 U2.78 U2.79 U2.86 U2.87 U2.88

## Keep-outs
Keep-Out Layer:
  the board outline again, w0.254